# EAGLE board Main (EAGLE 5.06)
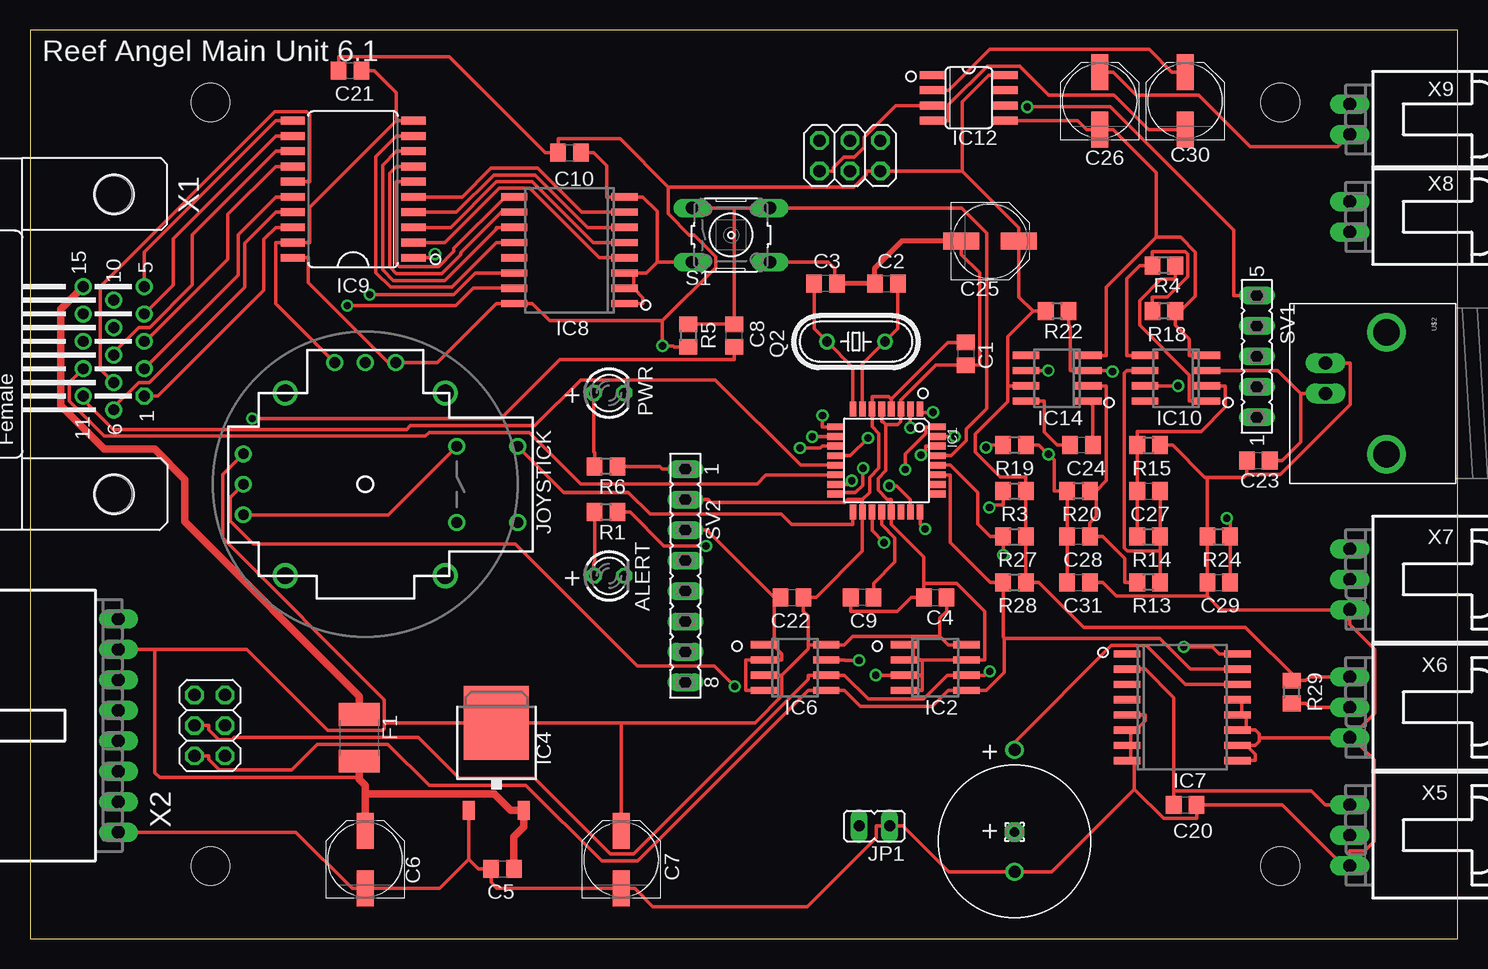
[diagram p0: board, top side]
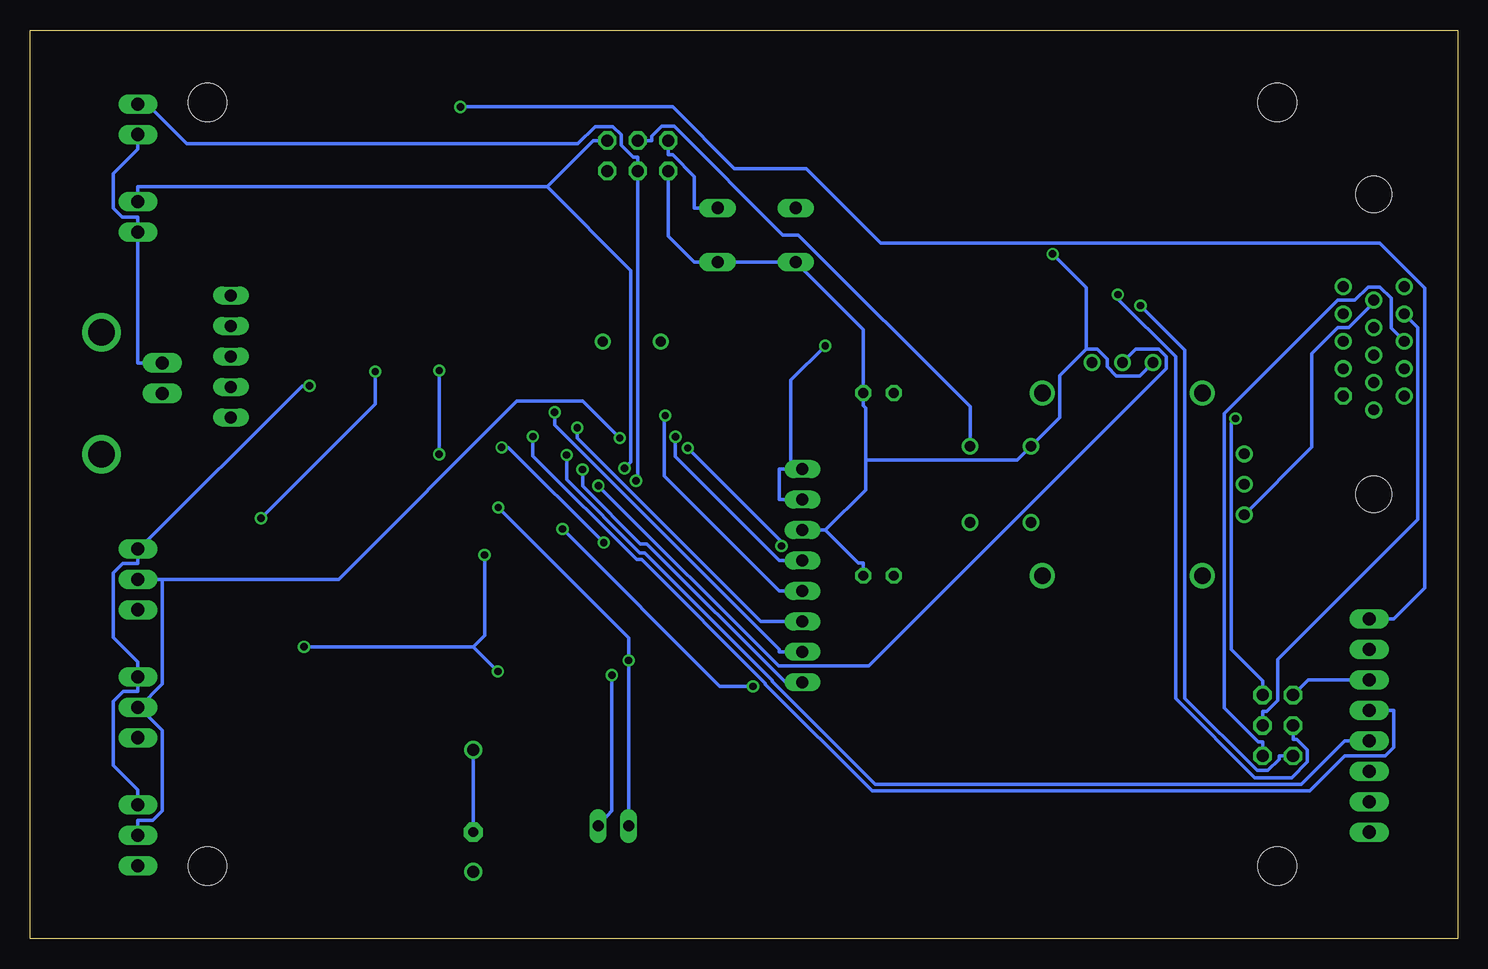
[diagram p1: board, bottom side, seen from below]

Size 118.97 x 75.77 mm. Coordinates in mm from the lower left corner, seen from the top.
Outline: 0,0 118.97,0 118.97,75.77 0,75.77 0,0
Copper layers (1*16): Top 0.035mm / dielectric 1.5mm / Bottom 0.035mm
Design rules "default *": minimum track width 10mil, minimum drill 24mil, track to track 8mil, track to pad 8mil, pad to pad 8mil, via to via 8mil, smd to smd 8mil, copper to edge 40mil, drill to drill 10mil, minimum pad ring 10mil, minimum via ring 8mil, stop-mask expansion 4mil, vias tented up to drill 0mil, thermal gap 10mil
Net classes: 0 default: width 0.305 mm, drill 0.305 mm, clearance 0.203 mm; 1 power: width 0.61 mm, drill 0.508 mm, clearance 0.203 mm; 2 gnd: width 0.305 mm, drill 0.508 mm, clearance 0.203 mm; 3 usbvcc: width 0.508 mm, drill 0.508 mm, clearance 0.203 mm; 4 aref: width 0.406 mm, clearance 0.203 mm
Holes 3.2 mm at 15.04,6.06 15.04,69.71 104.19,69.71 104.19,6.06
tKeepout: area 12.2,66.9 to 17.9,72.6; area 12.2,3.2 to 17.9,8.9; area 101.4,3.2 to 107,8.9; area 101.4,66.9 to 107,72.6; area 4.5,59.2 to 10.2,64.9; area 4.5,34.2 to 10.2,39.9
bKeepout: area 12.2,66.9 to 17.9,72.6; area 4.5,59.2 to 10.2,64.9; area 4.5,34.2 to 10.2,39.9; area 12.2,3.2 to 17.9,8.9; area 101.4,66.9 to 107,72.6; area 101.4,3.2 to 107,8.9

## Footprints (pad centres in the part's own frame; a part is rotated, then mirrored left to right if it is on the bottom)
LED3MM = drill 0.813 octagon: A -1.27,0; K 1.27,0
C0805 = smd 1.3 x 1.5: 1 -0.95,0; 2 0.95,0
PANASONIC_D = smd 3 x 1.4: + 2.4,0; - -2.4,0
L1812 = smd 1.9 x 3.4: 1 -1.95,0; 2 1.95,0
2X03 = drill 1.016 octagon: 1 -2.54,-1.27; 2 -2.54,1.27; 3 0,-1.27; 4 0,1.27; 5 2.54,-1.27; 6 2.54,1.27
TQFP32-08 = smd 1.27 x 0.559: 1 -4.293,2.8; 2 -4.293,2; 3 -4.293,1.2; 4 -4.293,0.4; 5 -4.293,-0.4; 6 -4.293,-1.2; 7 -4.293,-2; 8 -4.293,-2.8; 17 4.293,-2.8; 18 4.293,-2; 19 4.293,-1.2; 20 4.293,-0.4; 21 4.293,0.4; 22 4.293,1.2; 23 4.293,2; 24 4.293,2.8 | smd 0.559 x 1.27: 9 -2.8,-4.293; 10 -2,-4.293; 11 -1.2,-4.293; 12 -0.4,-4.293; 13 0.4,-4.293; 14 1.2,-4.293; 15 2,-4.293; 16 2.8,-4.293; 25 2.8,4.293; 26 2,4.293; 27 1.2,4.293; 28 0.4,4.293; 29 -0.4,4.293; 30 -1.2,4.293; 31 -2,4.293; 32 -2.8,4.293
SO-08 = smd 0.6 x 2.2: 1 -1.905,-2.6; 2 -0.635,-2.6; 3 0.635,-2.6; 4 1.905,-2.6; 5 1.905,2.6; 6 0.635,2.6; 7 -0.635,2.6; 8 -1.905,2.6
DPACK = smd 1 x 1.6: 1 -2.28,-4.8; 3 2.28,-4.8 | smd 5.4 x 6.2: 2 0,2.5
SO16W = smd 0.6 x 2.2: 1 -4.445,-4.6; 2 -3.175,-4.6; 3 -1.905,-4.6; 4 -0.635,-4.6; 5 0.635,-4.6; 6 1.905,-4.6; 7 3.175,-4.6; 8 4.445,-4.6; 9 4.445,4.6; 10 3.175,4.6; 11 1.905,4.6; 12 0.635,4.6; 13 -0.635,4.6; 14 -1.905,4.6; 15 -3.175,4.6; 16 -4.445,4.6
SO20W = smd 0.66 x 2.032: 1 -5.715,-5.029; 2 -4.445,-5.029; 3 -3.175,-5.029; 4 -1.905,-5.029; 5 -0.635,-5.029; 6 0.635,-5.029; 7 1.905,-5.029; 8 3.175,-5.029; 9 4.445,-5.029; 10 5.715,-5.029; 11 5.715,5.029; 12 4.445,5.029; 13 3.175,5.029; 14 1.905,5.029; 15 0.635,5.029; 16 -0.635,5.029; 17 -1.905,5.029; 18 -3.175,5.029; 19 -4.445,5.029; 20 -5.715,5.029
SO08 = smd 0.6 x 2.2: 1 -1.905,-2.6; 2 -0.635,-2.6; 3 0.635,-2.6; 4 1.905,-2.6; 5 1.905,2.6; 6 0.635,2.6; 7 -0.635,2.6; 8 -1.905,2.6
SO08' = smd 0.66 x 2.032: 1 -1.905,-3.073; 2 -0.635,-3.073; 3 0.635,-3.073; 4 1.905,-3.073; 5 1.905,3.073; 6 0.635,3.073; 7 -0.635,3.073; 8 -1.905,3.073
JOYSTICK = drill 0.9 round: B1A -3.175,12.7; B1B 3.175,12.7; B2A -3.175,7.62; B2B 3.175,7.62 | drill 0.889 round: H1 -2.54,-10.16; H2 0,-10.16; H3 2.54,-10.16; V1 -10.16,2.54; V2 -10.16,0; V3 -10.16,-2.54 | drill 1.397 round: MOUNT1 -7.62,6.668; MOUNT2 -7.62,-6.668; MOUNT3 7.62,-6.668; MOUNT4 7.62,6.668
JP1 = drill 0.914 long: 1 0,-1.27; 2 0,1.27
1,6/0,8 = drill 0.813 pad 1.6 octagon: 1 0,0
HC49/S = drill 0.813 round: 1 -2.413,0; 2 2.413,0
R0805 = smd 1.3 x 1.5: 1 -0.95,0; 2 0.95,0
B3F-10XX = drill 1.016 long: 1 -3.251,2.261; 2 3.251,2.261; 3 -3.251,-2.261; 4 3.251,-2.261
FE05-1 = drill 1 long: 1 -5.08,0; 2 -2.54,0; 3 0,0; 4 2.54,0; 5 5.08,0
FE08 = drill 1 long: 1 -8.89,0; 2 -6.35,0; 3 -3.81,0; 4 -1.27,0; 5 1.27,0; 6 3.81,0; 7 6.35,0; 8 8.89,0
BNC = drill 2.2 round: 3 -5.08,5.08; 4 5.08,5.08 | drill 1.1 long: GND -2.54,0; S 0,0
SOLDER = drill 1 round: + 7.62,0; - -2.54,0
HDF15H = drill 0.9 octagon: 1 4.329,2.54 | drill 0.9 round: 2 2.043,2.54; 3 -0.243,2.54; 4 -2.529,2.54; 5 -4.815,2.54; 6 5.472,0; 7 3.186,0; 8 0.9,0; 9 -1.386,0; 10 -3.672,0; 11 4.329,-2.54; 12 2.043,-2.54; 13 -0.243,-2.54; 14 -2.529,-2.54; 15 -4.815,-2.54 | hole 3: -12.5,0; 12.5,0
70553-08 = drill 1.092 long: 1 -8.89,-7.62; 2 -6.35,-7.62; 3 -3.81,-7.62; 4 -1.27,-7.62; 5 1.27,-7.62; 6 3.81,-7.62; 7 6.35,-7.62; 8 8.89,-7.62
70553-03 = drill 1.092 long: 1 -2.54,-7.62; 2 0,-7.62; 3 2.54,-7.62
70553-02 = drill 1.092 long: 1 -1.27,-7.62; 2 1.27,-7.62

## Placement (x,y rotation side)
ALERT  [LED3MM]  48.26,30.26 0 top
C1  100n  [C0805]  77.98,48.77 270 top
C2  22p  [C0805]  71.37,54.61 0 top
C3  22p  [C0805]  66.29,54.61 180 top
C4  100n  [C0805]  75.44,28.45 0 top
C5  100n  [C0805]  39.37,5.84 0 top
C6  100u  [PANASONIC_D]  27.94,6.6 90 top
C7  100u  [PANASONIC_D]  49.28,6.6 90 top
C8  100n  [C0805]  58.67,50.29 90 top
C9  100n  [C0805]  69.34,28.45 180 top
C10  100n  [C0805]  44.96,65.53 0 top
C20  100n  [C0805]  96.27,11.18 0 top
C21  100n  [C0805]  26.67,72.39 0 top
C22  100n  [C0805]  63.5,28.45 0 top
C23  100n  [C0805]  102.36,39.88 0 top
C24  100p  [C0805]  87.63,41.15 180 top
C25  100u  [PANASONIC_D]  80.01,58.17 0 top
C26  100u  [PANASONIC_D]  89.15,69.85 90 top
C27  470n  [C0805]  93.22,37.34 0 top
C28  470n  [C0805]  87.38,33.53 180 top
C29  100n  [C0805]  99.06,29.72 0 top
C30  100u  [PANASONIC_D]  96.27,69.85 90 top
C31  10n  [C0805]  87.38,29.72 0 top
F1  500mA  [L1812]  27.43,16.76 270 top
GPIO1  SDA-SCL-RST  [2X03]  14.99,17.78 270 top
IC1  ATMEGA8  [TQFP32-08]  71.37,39.88 270 top
IC2  24LC256SN  [SO-08]  75.44,22.61 270 top
IC4  MC33269D-5.0  [DPACK]  38.86,15.49 0 top
IC6  24LC256SN  [SO-08]  63.75,22.61 270 top
IC7  DS3231W  [SO16W]  96.01,19.3 270 top
IC8  PCF8574T  [SO16W]  44.96,57.4 90 top
IC9  74HC540DW  [SO20W]  26.92,62.48 90 top
IC10  CA3140D  [SO08]  95.5,46.74 90 top
IC12  ICL7660CSA  [SO08']  78.23,70.1 270 top
IC14  LM741D  [SO08]  85.6,46.74 90 top
ICSP  ICSP  [2X03]  68.33,65.28 180 top
JOYSTICK  JOYSTICKPTH  [JOYSTICK]  27.94,37.88 270 top
JP1  [JP1]  70.36,9.4 90 top
PAD1  [1,6/0,8]  82.04,8.89 0 top
PWR  [LED3MM]  48.26,45.5 0 top
Q2  16MHz  [HC49/S]  68.83,49.78 180 top
R1  1k  [R0805]  48.01,35.56 180 top
R3  10K  [R0805]  82.04,37.34 0 top
R4  4.7k  [R0805]  94.49,56.13 180 top
R5  10K  [R0805]  54.86,50.29 270 top
R6  1k  [R0805]  48.01,39.37 180 top
R13  220k  [R0805]  93.22,29.72 180 top
R14  220k  [R0805]  93.22,33.53 0 top
R15  33k  [R0805]  93.22,41.15 0 top
R18  4.7k  [R0805]  94.49,52.32 180 top
R19  4.7k  [R0805]  82.04,41.15 180 top
R20  220k  [R0805]  87.38,37.34 180 top
R22  3k  [R0805]  85.6,52.32 180 top
R24  1k  [R0805]  99.06,33.53 0 top
R27  4k7  [R0805]  82.04,33.53 0 top
R28  4k7  [R0805]  82.04,29.72 0 top
R29  4k7  [R0805]  105.16,20.57 90 top
S1  [B3F-10XX]  58.42,58.67 0 top
SV1  [FE05-1]  102.23,48.55 90 top
SV2  [FE08]  54.61,30.26 270 top
U$2  BNCPTH  [BNC]  107.95,45.47 270 top
U$4  CR1220  [SOLDER]  82.04,8.13 90 top
X1  [HDF15H]  6.99,49.57 270 top
X2  C-GRID-08-70553  [70553-08]  -0.25,17.78 90 top
X5  C-GRID-03-70553  [70553-03]  117.6,8.64 270 top
X6  C-GRID-03-70553  [70553-03]  117.6,19.3 270 top
X7  C-GRID-03-70553  [70553-03]  117.6,29.97 270 top
X8  C-GRID-02-70553  [70553-02]  117.6,60.2 270 top
X9  C-GRID-02-70553  [70553-02]  117.6,68.33 270 top

## Library data of the parts
ALERT PWR = led
C1-C10 C20-C31 F1 R1 R3-R6 R13-R15 R18-R20 R22 R24 R27-R29 = rcl
GPIO1 ICSP = pinhead
IC1 = atmel
IC2 IC6 = microchip
IC4 IC10 IC14 = linear
IC7 = DS3231
IC8 = micro-philips
IC9 = 74xx-eu
IC12 = maxim
JOYSTICK U$2 = SparkFun
JP1 = jumper
PAD1 = wirepad
Q2 = crystal
S1 = switch-omron
SV1 SV2 = con-lsta
U$4 = CR1220
X1 = con-subd
X2 X5-X9 = con-molex

## Nets
+5V: C1.1 C4.2 C5.2 C6.+ C7.+ C10.1 C20.1 C21.1 C22.2 C25.+ F1.2 IC1.4 IC1.6 IC1.18 IC2.8 IC4.2 IC4.3 IC6.3 IC6.8 IC7.2 IC8.16 IC9.20 IC10.7 IC12.8 IC14.7 ICSP.2 JOYSTICK.H1 JOYSTICK.V1 R3.2 R5.2 R6.1 R22.2 R27.2 R28.2 R29.2 SV2.1 SV2.2 X2.7 X5.1 X6.1 X7.1
CTS: GPIO1.1 X2.6
GND [gnd]: ALERT.K C1.2 C2.1 C3.1 C4.1 C5.1 C6.- C7.- C9.2 C10.2 C20.2 C21.2 C22.1 C23.1 C25.- C26.+ C29.1 C31.2 IC1.3 IC1.5 IC1.21 IC2.1 IC2.2 IC2.3 IC2.4 IC2.7 IC4.1 IC6.1 IC6.2 IC6.4 IC7.5 IC7.6 IC7.7 IC7.8 IC7.9 IC7.10 IC7.11 IC7.12 IC7.13 IC8.1 IC8.2 IC8.3 IC8.8 IC9.1 IC9.10 IC9.19 IC12.3 ICSP.6 JOYSTICK.B2A JOYSTICK.H3 JOYSTICK.V3 JP1.1 PWR.K R15.2 R24.1 S1.3 S1.4 SV2.3 U$2.GND U$4.- X1.10 X2.1 X5.3 X6.3 X7.3 X8.2 X9.2
MISO: IC1.16 ICSP.1 X8.1
MOSI: IC1.15 ICSP.4 X9.1
N$1: IC1.1 SV2.7
N$2: IC1.23 JOYSTICK.V2
N$3: PWR.A R6.2
N$4: IC1.24 JOYSTICK.H2
N$5: C9.1 IC1.20
N$6: C2.2 IC1.7 Q2.1
N$7: C3.2 IC1.8 Q2.2
N$8: IC9.18 X1.1
N$9: IC1.30 X2.4
N$10: IC1.2 SV2.6
N$11: IC1.31 X2.5
N$12: C24.1 IC14.1
N$13: IC6.7 JP1.2 R3.1
N$14: IC1.10 SV2.4
N$15: IC1.11 R1.1
N$16: GPIO1.6 X1.13
N$17: IC9.17 X1.6
N$18: GPIO1.3 IC1.28 IC2.6 IC6.6 IC7.16 IC8.14 R27.1
N$19: GPIO1.5 IC1.27 IC2.5 IC6.5 IC7.15 IC8.15 R28.1
N$20: GPIO1.4 X1.14
N$21: IC9.16 X1.2
N$22: IC7.14 PAD1.1 U$4.+
N$23: IC9.15 X1.7
N$24: IC1.12 R29.1 X5.2 X6.2 X7.2
N$25: IC9.14 X1.3
N$26: IC9.13 X1.8
N$27: IC9.12 X1.4
N$28: IC9.11 X1.5
N$29: IC8.4 IC9.2
N$30: IC8.5 IC9.3
N$32: IC8.6 IC9.4
N$33: IC8.7 IC9.5
N$34: IC8.9 IC9.6
N$35: IC8.10 IC9.7
N$36: IC8.11 IC9.8
N$37: IC1.14 X1.12
N$38: IC1.13 X1.11
N$39: IC8.12 IC9.9
N$40: IC1.32 SV2.8
N$41: C29.2 IC14.3 R22.1 R24.2
N$42: C30.- IC12.4
N$43: C30.+ IC12.2
N$44: C23.2 IC10.3 U$2.S
N$45: C24.2 IC14.8
N$47: C27.2 IC10.6 R13.1 R14.2
N$48: C27.1 IC10.2 R14.1 R15.1
N$49: C8.1 GPIO1.2
N$50: IC10.5 R4.2 R18.2
N$51: IC10.1 R4.1
N$53: C28.1 IC14.2 R13.2 R20.1
N$54: IC1.19 R19.2
N$55: C28.2 C31.1 IC14.6 R19.1 R20.2
N$62: IC1.9 SV2.5
N$63: ALERT.A R1.2
N$72: SV1.5 X2.8
RESET: C8.2 IC1.29 ICSP.5 R5.1 S1.1 S1.2
SCK: IC1.17 ICSP.3 JOYSTICK.B1A
V-: C26.- IC10.4 IC12.5 IC14.4 R18.1
VIN [power]: F1.1 X1.15

## Tracks (layer width: path | path; a pad name or v marks a point on that pad's centre or on a via)
+5V  (via drill 0.61 pad 1.02)
  Top 0.305: 52.7,51.53 v52.7,49.43 53.62,49.43 53.71,49.34 R5.2 | 53.19,62.68 53.19,60.44 54.95,58.67 55.36,58.67 57.15,56.88 57.15,55.98 52.7,51.53 | 52.7,51.53 43.3,51.53 41.86,52.96 IC8.16 38.85,52.96 33.94,48.04 JOYSTICK.V1 29.85,48.04 23.18,54.71 23.18,56.77 IC9.20 | 53.19,62.68 68.67,62.68 69.7,63.72 69.7,64.01 ICSP.2 77.67,64.01 | 53.19,62.68 49.18,66.69 44.01,66.69 C10.1 42.95,65.53 34.94,73.55 25.72,73.55 C21.1 | 69.37,36.63 69.96,37.22 69.96,38.47 70.75,39.25 70.75,42.12 70.17,42.7 IC1.6 70.17,45.21 71.57,45.21 71.77,45.01 | 69.37,36.63 68.13,36.63 67.88,36.38 56.76,36.38 56.52,36.61 SV2.2 | 69.37,36.63 IC1.18 69.37,32.32 65.51,28.45 C22.2 64.45,27.29 64.85,26.89 64.85,24.51 | 83.59,52.32 82.41,53.51 82.41,57.06 C25.+ 82.41,59.27 77.67,64.01 | 83.59,52.32 81.49,50.22 81.49,46.1 | 81.49,46.1 IC14.7 | 81.49,46.1 81.49,44.8 78.75,42.06 78.75,40.58 80.84,38.49 82.99,38.49 R3.2 R27.2 82.99,30.88 R28.2 84.05,29.72 87.8,25.97 101.29,25.97 105.73,21.52 | IC12.8 79.88,72.01 77.67,69.8 77.67,64.01 | 64.85,24.51 64.85,24.16 62.66,21.97 | 64.85,24.51 IC6.8 67.86,24.51 68.57,25.22 75.83,25.22 | 71.77,45.01 76.48,49.72 76.82,49.72 C1.1 | IC7.2 92.92,22.48 95.32,20.08 95.32,12.33 | 95.32,12.33 C20.1 | X5.1 107.94,11.18 106.78,12.33 95.32,12.33 | v95.68,46.1 94.41,46.1 IC10.7 | C4.2 76.39,27.29 75.83,26.73 75.83,25.22 | 75.83,25.22 76.53,24.51 IC2.8 | 105.73,21.52 106.31,21.52 106.63,21.84 X6.1 | 105.73,21.52 R29.2 | 71.77,45.01 IC1.4 | 49.28,17.99 41.97,17.99 IC4.2 35.76,17.99 29.54,17.99 | 62.66,21.97 62.66,20.23 60.43,17.99 49.28,17.99 | 49.28,17.99 C7.+ | 29.54,17.99 29.54,17.52 29.38,17.36 24.82,17.36 18.04,24.13 14.86,24.13 10.41,24.13
  Top 0.305: 10.41,24.13 X2.7 | JOYSTICK.H1 16.07,38.71 16.07,33.4 29.54,19.93 29.54,17.99 | 62.66,21.97 IC6.3 | SV2.1 52.7,39.15 52.48,39.37 49.48,39.37 R6.1 | 83.59,52.32 R22.2 | 27.43,13.3 27.18,13.46 10.79,13.46 10.41,13.84 10.41,24.13
  Top 0.61: 27.94,12.09 C6.+ | 27.94,12.09 27.94,12.8 27.43,13.3 F1.2 | 27.94,12.09 38.68,12.09 40.08,10.69 IC4.3 41.14,9.34 40.32,8.51 C5.2
  Bottom 0.305: 109.98,32.42 96.3,46.1 v95.68,46.1 | 109.98,32.42 109.98,31.29 111.24,31.29 112.04,30.49 112.04,25.12 109.98,23.07 X6.1 109.98,20.62 111.22,20.62 112.04,19.8 112.04,14.46 109.98,12.4 X5.1 | 109.98,32.42 X7.1 | 55.57,39.15 55.57,46.57 v52.7,49.43 | 55.57,39.15 56.52,39.15 56.52,36.61 SV2.2 | 55.57,39.15 SV2.1
CTS
  Bottom 0.305: GPIO1.1 12.45,21.59 X2.6
GND  (via drill 0.61, 0.61 pad 1.02)
  Top 0.305: SV2.3 56.52,34.07 56.52,33.95 62.02,28.45 | 77.36,58.17 C25.- 77.61,57.06 79.14,55.53 79.14,47.82 78.56,47.82 C1.2 75.48,47.82 72.57,44.91 IC1.3 72.57,43.13 72.31,42.87 71.31,42.87 | 71.31,42.87 71.31,39.03 70.68,38.39 70.68,37.4 71.45,36.63 71.77,36.63 IC1.21 71.77,35.06 71.77,34.54 74.49,31.83 74.49,29.61 | 62.02,28.45 62.02,24.62 61.91,24.51 | 62.02,28.45 C22.1 | JOYSTICK.V3 20.47,52.97 20.47,58.04 IC9.19 23.32,58.04 23.32,60.99 30.53,68.2 | IC1.5 70.97,43.13 71.05,43.13 71.31,42.87 | 50.31,55.5 IC8.3 | 52.27,56.41 51.35,55.5 50.31,55.5 | 50.31,55.5 50.31,54.23 | 52.27,56.41 52.27,60.65 51.06,61.85 IC8.8 48.05,61.85 48.05,64.44 46.97,65.53 C10.2 | 52.27,56.41 53.24,56.41 S1.3 | X9.2 108.97,66.04 101.68,66.04 97.39,70.32 92.19,70.32 90.26,72.25 C26.+ | 109.98,16.95 110.21,16.95 112.05,18.79 112.05,24.14 109.98,26.21 X7.3 99.24,27.43 98.11,28.56 | 98.11,28.56 98.11,28.7 C29.1 R24.1 98.11,38.47 | 98.11,28.56 90.54,28.56 89.38,29.72 C31.2 | IC12.3 73.74,69.47 72.13,69.47 69.51,66.84 69.51,66.01 68.67,65.18 67.83,65.18 66.95,64.3 66.95,64.01 ICSP.6 | 92.03,12.47 85.14,5.59 U$4.- 76.56,5.59 72.75,9.4 JP1.1 70.51,9.4 70.51,8.42 64.77,2.68 51.91,2.68 50.38,4.2 C7.- 38.9,4.2 38.42,4.69 C5.1 37.36,5.84 36.58,6.62 | 74.34,21.97 74.34,20.7 IC2.4 72.77,20.83 | 74.34,23.24 IC2.7 79.54,23.24 79.54,27.31 77.25,29.61 74.49,29.61 | 74.34,23.24 73.59,23.24 | 74.34,21.97 74.34,23.24 | 73.59,23.24 73.22,23.24 IC2.2 | 74.34,21.97 IC2.3 v70.48,21.97 | IC6.4 59.65,20.7 59.65,23.24 IC6.2 62.66,23.24 62.66,23.76 61.91,24.51 | 61.91,24.51 IC6.1 | 30.53,68.2 30.97,68.2 IC9.10 | JOYSTICK.B2A 29.84,35.34 JOYSTICK.H3
  Top 0.305: 73.59,23.24 73.59,24.51 IC2.1 | 74.49,29.61 74.49,29.39 C4.1 73.43,28.45 72.28,27.29 68.39,27.29 C9.2 | C21.2 28.68,72.39 30.53,70.54 30.53,68.2 | 109.98,6.29 109.98,7.32 111.22,7.32 112.04,8.14 112.04,14.9 109.98,16.95 | 109.98,16.95 X6.3 107.94,16.76 102.44,16.76 | 109.98,6.29 109.23,6.29 104.34,11.18 98.27,11.18 C20.2 97.22,10.02 94.48,10.02 92.03,12.47 | IC7.9 102.12,14.86 102.12,15.38 101.36,16.13 | 98.11,38.47 97.9,38.47 95.22,41.15 R15.2 | 98.11,38.47 101.16,38.47 101.41,38.72 | 101.41,38.72 C23.1 | U$2.GND 110.01,48.01 110.01,44.54 104.19,38.72 101.41,38.72 | 92.03,12.47 92.03,14.86 | IC8.1 51.06,52.96 51.06,53.48 50.31,54.23 | 50.31,54.23 IC8.2 | v33.76,57.09 33.7,57.09 33.38,56.77 IC9.1 | 91.72,16.13 91.72,15.17 92.03,14.86 | 109.98,6.29 X5.3 | 92.03,14.86 IC7.8 | 102.44,16.76 102.44,16.45 102.12,16.13 101.36,16.13 | 102.44,16.76 102.44,17.08 102.12,17.4 101.36,17.4 | 100.99,18.67 101.36,18.67 101.36,17.4 | 100.99,18.67 IC7.12 | IC7.13 100.99,19.94 100.99,18.67 | 101.36,16.13 IC7.10 | 91.72,17.4 92.17,17.4 92.92,18.15 92.92,18.67 IC7.5 | 91.72,17.4 IC7.6 | 91.72,16.13 IC7.7 | 91.72,16.13 91.72,17.4 | 36.58,6.62 IC4.1 | 36.58,6.62 34.16,4.2 C6.- 27.39,4.2 26.83,4.2 22.15,8.89 X2.1 | 101.36,17.4 IC7.11 | C3.1 67.06,54.8 67.06,55.88 66.52,56.41 S1.4
  Top 0.406: 70.36,54.61 C2.1 | 70.36,54.61 70.36,55.88 72.64,58.17 C25.- | 70.36,54.61 C3.1
  Bottom 0.305: X9.2 109.98,65.83 112.04,63.77 112.04,60.91 111.28,60.15 109.98,60.15 X8.2 109.98,57.7 110.01,57.68 110.01,48.01 U$2.GND | JOYSTICK.H3 12.14,40.98 12.14,48.79 9.98,50.95 9.07,50.95 6.99,53.04 X1.10 | 30.95,49.18 30.05,49.18 29.21,48.34 29.21,47.71 28.43,46.93 26.51,46.93 JOYSTICK.V3 | 30.95,49.18 33.15,46.97 33.15,43.47 JOYSTICK.B2A 36.69,39.93 49.35,39.93 | v33.76,57.09 30.95,54.28 30.95,49.18 | ICSP.6 65.79,58.6 63.6,56.41 S1.4 59.74,56.41 S1.3 49.53,50.77 PWR.K 49.53,44.44 49.35,44.26 49.35,39.93 | 49.35,39.93 49.35,37.42 52.7,34.07 | ALERT.K 49.53,31.33 49.95,31.33 52.7,34.07 | 52.7,34.07 SV2.3 | v70.48,21.97 70.48,10.67 JP1.1
MISO  (via drill 0.61 pad 1.02)
  Top 0.305: v69.43,39.23 69.4,39.2 69.4,37.8 68.79,37.19 67.19,37.19 IC1.16
  Bottom 0.305: 75.89,62.69 72.03,66.55 ICSP.1 | 75.89,62.69 109.98,62.69 X8.1 | 75.89,62.69 68.92,55.73 68.92,39.73 v69.43,39.23
MOSI  (via drill 0.61 pad 1.02)
  Top 0.305: IC1.15 68.17,37.88 v68.48,38.18
  Bottom 0.305: v68.48,38.18 68.33,38.34 68.33,62.84 ICSP.4 68.33,65.18 68.69,65.18 69.7,66.19 69.7,67.03 70.39,67.73 71.87,67.73 73.31,66.28 105.9,66.28 109.21,69.6 X9.1
N$1  (via drill 0.61 pad 1.02)
  Top 0.305: v75.25,43.89 74.45,43.89 IC1.1
  Bottom 0.305: SV2.7 56.52,23.91 56.52,24.11 75.25,42.84 v75.25,43.89
N$2  (via drill 0.61 pad 1.02)
  Top 0.305: IC1.23 73.37,36.63 72.24,37.76 v71.61,37.76
  Bottom 0.305: JOYSTICK.V2 26.81,49.17 24.93,49.17 24.29,48.54 24.29,47.55 49.1,22.74 56.59,22.74 v71.61,37.76
N$3
  Top 0.305: R6.2 47.06,40.53 46.99,40.59 PWR.A
N$4  (via drill 0.61 pad 1.02)
  Top 0.305: JOYSTICK.H2 16.68,36.78 16.68,34.82 18.59,32.91 40.45,32.91 50.6,22.75 57.01,22.75 v58.72,21.05 | IC1.24 74.17,34.54 74.21,34.54 v74.6,34.16
  Bottom 0.305: v58.72,21.05 61.48,21.05 v74.6,34.16
N$5
  Top 0.305: C9.1 70.29,29.61 72.08,31.4 72.08,33.44 70.97,34.54 IC1.20
N$6
  Top 0.305: C2.2 72.32,50.86 Q2.1 69.37,47.91 IC1.7
N$7
  Top 0.305: C3.2 65.34,50.86 Q2.2 68.57,47.63 IC1.8
N$8
  Top 0.305: IC9.18 20.47,59.31 19.48,58.32 19.48,54.09 10.64,45.24 X1.1
N$9  (via drill 0.61 pad 1.02)
  Top 0.305: v74.25,40.33 74.62,40.7 74.62,41.08 IC1.30
  Bottom 0.305: v74.25,40.33 74.25,38.27 68.16,32.17 67.76,32.17 57.13,21.54 57.13,21.45 48.55,12.87 13.05,12.87 9.41,16.51 X2.4
N$10  (via drill 0.61 pad 1.02)
  Top 0.305: v73.37,42.6 IC1.2
  Bottom 0.305: 56.52,26.45 | 56.52,26.45 58.07,26.45 73.37,41.76 v73.37,42.6 | SV2.6 56.52,26.45
N$11  (via drill 0.61 pad 1.02)
  Top 0.305: v77.07,41.88 76.71,41.88 IC1.31
  Bottom 0.305: v77.07,41.88 77.07,40.26 68.42,31.61 67.99,31.61 57.69,21.31 57.69,21.22 48.78,12.31 12.33,12.31 9.41,15.23 6.03,15.23 5.32,15.94 5.32,19.05 X2.5
N$12
  Top 0.305: IC14.1 88.58,44.45 C24.1
N$13  (via drill 0.61 pad 1.02)
  Top 0.305: R3.1 81.09,36.18 80.18,36.18 v79.95,35.95 | v69.09,23.21 67.89,23.21 67.86,23.24 IC6.7
  Bottom 0.305: v79.95,35.95 69.09,25.09 v69.09,23.21 JP1.2
N$14  (via drill 0.61 pad 1.02)
  Top 0.305: IC1.10 66.04,41.88 66.02,41.86 v65.19,41.86
  Bottom 0.305: SV2.4 56.52,31.53 65.19,40.2 v65.19,41.86
N$15  (via drill 0.61 pad 1.02)
  Top 0.305: v56.34,32.74 52.83,32.74 50.01,35.56 R1.1 | IC1.11 66.02,41.08 65.86,40.92 v64.17,40.92
  Bottom 0.305: v64.17,40.92 56.34,33.1 v56.34,32.74
N$16
  Bottom 0.305: GPIO1.6 16.26,16.41 16.62,16.41 19.44,19.23 19.44,43.78 9.99,53.24 8.58,53.24 7.47,54.35 6.49,54.35 5.56,53.42 5.56,50.92 X1.13
N$17
  Top 0.305: X1.6 6.99,44.31 9.06,46.38 9.95,46.38 17.89,54.32 17.89,58 20.47,60.58 IC9.17
N$18  (via drill 0.61 pad 1.02)
  Top 0.305: v79.99,22.29 79.86,22.29 79.54,21.97 IC2.6 76.44,21.97 74.46,19.99 69.84,19.99 67.86,21.97 IC6.6 65.6,21.97 64.85,21.97 64.85,21.61 50.3,7.06 48.37,7.06 42.07,13.36 35.76,13.36 32.34,16.78 17.04,16.78 16.83,16.58 15.72,16.58 14.88,17.42 14.88,17.78 GPIO1.3 | IC1.28 76.71,39.48 78.97,37.22 78.97,34.6 80.03,33.53 R27.1 v81.09,32 | v28.32,53.7 35.31,53.7 37.1,55.5 IC8.14 | v96.14,24.34 98.51,24.34 99.11,23.75 IC7.16
  Bottom 0.305: 82.04,24.34 81.09,25.29 v81.09,32 | 82.04,24.34 v96.14,24.34 | v79.99,22.29 82.04,24.34 | GPIO1.3 13.72,16.61 13.42,16.61 12.55,15.73 12.55,14.73 13.85,13.43 16.91,13.43 23.51,20.04 23.51,48.54 28.32,53.35 v28.32,53.7
N$19  (via drill 0.61 pad 1.02)
  Top 0.305: 81.2,25.05 81.2,22.21 79.69,20.7 IC2.5 76.53,20.7 75.2,19.37 69.19,19.37 67.86,20.7 IC6.5 64.85,20.7 50.65,6.5 47.63,6.5 41.32,12.8 33.25,12.8 29.83,16.22 23.95,16.22 21.8,14.07 15.76,14.07 14.88,14.95 14.88,15.24 GPIO1.5 | IC1.27 76.71,38.68 76.71,33.05 80.03,29.72 R28.1 81.09,29.14 81.09,28.56 81.09,25.16 81.2,25.05 | 81.2,25.05 94.14,25.05 96.7,22.48 IC7.15 | IC8.15 36.92,54.23 35.48,52.79 v26.44,52.79
  Bottom 0.305: v26.44,52.79 22.73,49.08 22.73,20.05 16.7,14.02 15.81,14.02 14.88,14.95 14.88,15.24 GPIO1.5
N$20
  Bottom 0.305: GPIO1.4 16.26,18.95 15.89,18.95 14.99,19.86 14.99,23.28 3.31,34.95 3.31,50.97 X1.14
N$21
  Top 0.305: X1.2 17.33,55.33 17.33,58.71 20.47,61.85 IC9.16
N$22
  Top 0.305: U$4.+ 82.04,16.38 90.12,24.46 93.03,24.46 96.28,21.21 IC7.14
  Bottom 0.305: U$4.+ 82.04,10.1 PAD1.1
N$23
  Top 0.305: IC9.15 23.32,63.12 23.32,68.7 23.08,68.94 20.41,68.94 5.86,54.38 5.86,47.51 X1.7
N$24  (via drill 0.61 pad 1.02)
  Top 0.305: v69.83,41.74 68.37,40.28 IC1.12 | R29.1 106.31,19.62 106.63,19.3 X6.2
  Bottom 0.305: 107.94,29.97 93.25,29.97 78.39,44.83 72.92,44.83 v69.83,41.74 | 107.94,29.97 107.94,21.23 109.86,19.3 | 109.86,19.3 X6.2 | 109.86,19.3 107.93,17.37 107.93,10.67 108.74,9.86 109.98,9.86 X5.2 | 107.94,29.97 X7.2
N$25
  Top 0.305: IC9.14 20.47,64.39 16.5,60.41 16.5,56.68 9.63,49.81 X1.3
N$26
  Top 0.305: IC9.13 20.47,65.66 13.53,58.72 13.53,54.52 9.96,50.95 9.06,50.95 6.99,48.88 X1.8
N$27
  Top 0.305: IC9.12 20.47,66.93 11.92,58.37 11.92,54.49 X1.4
N$28
  Top 0.305: X1.5 9.53,57.25 20.47,68.2 IC9.11
N$29
  Top 0.305: IC8.4 47.43,56.77 41.64,62.57 39.1,62.57 34.57,58.04 33.38,58.04 IC9.2
N$30
  Top 0.305: IC8.5 46.95,58.04 41.87,63.12 38.87,63.12 35.05,59.31 IC9.3
N$32
  Top 0.305: IC8.6 46.47,59.31 42.1,63.68 38.64,63.68 35.53,60.58 IC9.4
N$33
  Top 0.305: IC8.7 45.99,60.58 42.33,64.24 38.41,64.24 36.01,61.85 IC9.5
N$34
  Top 0.305: IC8.9 39.61,61.85 35.33,57.57 35.33,57.32 34.05,56.03 30.76,56.03 30.53,56.26 30.53,63.12 IC9.6
N$35
  Top 0.305: IC8.10 39.26,60.58 35.89,57.21 35.89,57.04 34.32,55.47 30.53,55.47 29.97,56.03 29.97,63.83 30.53,64.39 IC9.7
N$36
  Top 0.305: IC8.11 38.85,59.31 38.85,59.16 34.58,54.89 30.27,54.89 29.38,55.78 29.38,64.51 30.53,65.66 IC9.8
N$37
  Top 0.305: X1.12 3.28,46.36 3.28,44.83 6.21,41.9 32.95,41.9 33.25,42.21 41.61,42.21 45.89,37.93 60.59,37.93 61.33,38.68 IC1.14
N$38
  Top 0.305: X1.11 4.45,44.98 6.96,42.46 31.39,42.46 31.69,42.77 42.08,42.77 45.91,46.6 57.11,46.6 64.23,39.48 66.04,39.48 IC1.13
N$39
  Top 0.305: IC8.12 38.85,58.04 35.14,54.33 30.04,54.33 28.82,55.55 28.82,65.22 30.53,66.93 IC9.9
N$40  (via drill 0.61 pad 1.02)
  Top 0.305: v72.93,39.12 72.93,40.42 74.62,42.11 74.62,42.68 IC1.32 | v72.93,39.12
  Bottom 0.305: SV2.8 56.01,21.37 67.57,32.93 68.12,32.93 72.93,37.74 v72.93,39.12
N$41  (via drill 0.61 pad 1.02)
  Top 0.305: v99.72,35.06 99.72,34.97 100.01,34.68 R24.2 C29.2 | v90.21,47.3 89.78,47.3 89.7,47.37 IC14.3 86.69,47.37 86.69,51.02 86.55,51.17 R22.1
  Bottom 0.305: v90.21,47.3 90.21,44.57 v99.72,35.06
N$42
  Top 0.305: IC12.4 76.58,68.2 76.58,69.56 79.78,72.77 82.47,72.77 84.91,70.33 90.35,70.33 93.22,67.45 C30.-
N$43
  Top 0.305: C30.+ 95.16,72.25 93.25,74.16 80,74.16 76.58,70.74 IC12.2
N$44
  Top 0.305: IC10.3 103.99,47.37 105.89,45.47 | C23.2 104.37,39.88 105.89,41.4 105.89,45.47 | 105.89,45.47 U$2.S
N$45
  Top 0.305: C24.2 85.62,41.15 84.5,42.27 84.5,44.83 IC14.8
N$47
  Top 0.305: 94.17,32.34 R13.1 | 94.17,32.34 R14.2 C27.2 | 94.17,32.34 91.45,32.34 91.2,32.59 91.2,47.17 91.4,47.37 IC10.6
N$48
  Top 0.305: IC10.2 99.61,46.1 99.61,44.33 97.58,42.3 92.27,42.3 R15.1 C27.1 R14.1
N$49  (via drill 0.61 pad 1.02)
  Top 0.305: v18.52,43.38 39.22,43.38 44.13,48.28 58.67,48.28 C8.1
  Bottom 0.305: GPIO1.2 16.26,21.49 18.89,24.12 18.89,43.01 v18.52,43.38
N$50
  Top 0.305: IC10.5 91.4,48.64 91.4,55.05 92.48,56.13 R4.2 93.54,57.29 96.27,57.29 96.5,57.06 96.5,55.21 94.77,53.48 93.54,53.48 R18.2
N$51
  Top 0.305: IC10.1 96.6,44.83 96.6,47.02 92.46,51.15 92.46,53.23 94.22,54.98 95.44,54.98 R4.1
N$53
  Top 0.305: 88.85,37.34 89.7,38.19 89.7,46.1 IC14.2 | 88.85,37.34 88.85,35.21 88.33,34.68 C28.1 89.38,33.53 91.21,31.7 91.21,29.72 R13.2 | 88.85,37.34 R20.1
N$54  (via drill 0.61 pad 1.02)
  Top 0.305: IC1.19 70.17,34.02 v71.17,33.03 | R19.2 80.03,41.15 79.85,40.97 v79.67,40.97
  Bottom 0.305: v79.67,40.97 79.1,40.97 v71.17,33.03
N$55  (via drill 0.61 pad 1.02)
  Top 0.305: v84.86,47.37 84.5,47.37 IC14.6 | R19.1 84.05,41.15 84.8,40.4 v84.88,40.4 85.37,39.91 85.37,37.34 R20.2 C28.2 C31.1
  Bottom 0.305: v84.88,40.4 84.88,47.36 v84.86,47.37
N$62  (via drill 0.61 pad 1.02)
  Top 0.305: v66.04,43.63 66.04,42.68 IC1.9
  Bottom 0.305: SV2.5 56.52,28.99 66.12,38.59 66.12,43.55 v66.04,43.63
N$63
  Top 0.305: ALERT.A 46.99,31.33 47.06,31.4 R1.2
N$72  (via drill 0.61 pad 1.02)
  Top 0.305: v83.11,69.36 90.04,69.36 100.32,59.08 100.32,53.63 SV1.5
  Bottom 0.305: v83.11,69.36 65.42,69.36 60.28,64.21 54.3,64.21 48.09,58.01 6.49,58.01 2.75,54.27 2.75,29.24 5.32,26.67 X2.8
RESET
  Top 0.305: IC1.29 76.76,40.28 78.01,41.53 78.01,42.51 79.73,44.23 79.73,58.83 77.63,60.94 S1.2 58.67,60.94 | R5.1 56.02,51.24 56.03,51.25 C8.2 | C8.2 58.67,52.3 58.67,60.94 | C8.2 | 58.67,60.94 S1.1
  Bottom 0.305: ICSP.5 65.79,65.38 65.42,65.38 63.6,63.56 63.6,60.94 S1.2
SCK
  Top 0.305: JOYSTICK.B1A 44.48,37.22 49.85,37.22 51.67,35.4 62.61,35.4 63.47,34.54 68.57,34.54 IC1.17
  Bottom 0.305: ICSP.3 67.16,66.55 67.16,66.91 66.34,67.73 65.3,67.73 56.25,58.67 54.94,58.67 40.64,44.37 JOYSTICK.B1A
V-
  Top 0.305: IC14.4 89.7,48.64 89.7,54.33 93.85,58.48 | 93.85,58.48 95.88,58.48 97.09,57.26 97.09,53.59 95.44,51.93 | 93.85,58.48 93.85,63.86 90.26,67.45 C26.- 88.05,67.45 87.3,68.2 IC12.5 | 95.44,51.93 R18.1 | 95.44,51.93 95.44,51.89 95.44,51.17 96.6,50.01 96.6,48.64 IC10.4
VIN
  Top 0.61: F1.1 27.43,20.22 12.88,34.77 12.88,38.3 10.38,40.84 6.2,40.84 2.57,44.47 2.57,52.5 X1.15

## Text on the board
tNames: Reef Angel Main Unit 6.1 | + | + | + | +